# Altium PCB PCB1.PcbDoc (part 2 of 2)
Units mil, origin at the board's own origin, x right, y up, seen from the top; angles counter-clockwise.
Board outline 5905 x 3937 mil, 2 copper layers (Top Layer, Bottom Layer); 159 components, 155 nets, 616 pads, 9 vias.
Unrouted connection lines stored in the file: 401.
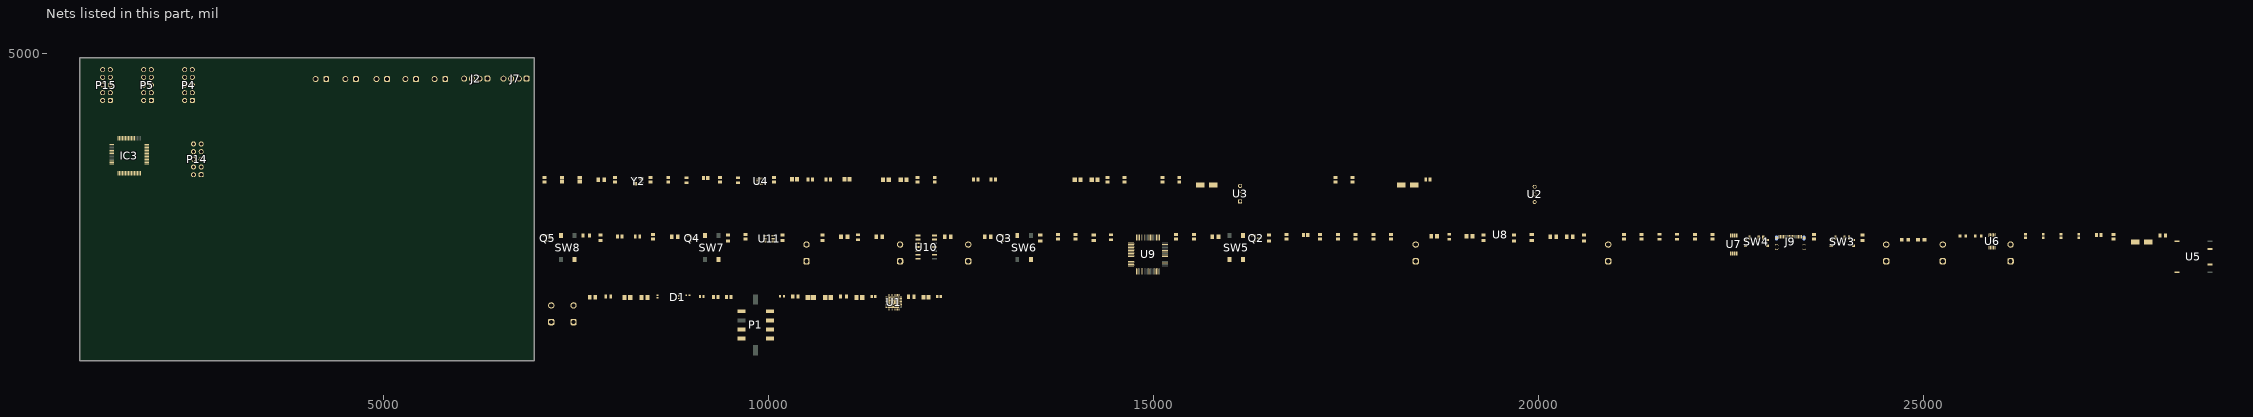
[diagram p2: the nets of this part, all layers, seen from the top]

## Part data
C1 C3: library part CMP-2006-03343-2, "CAP CER 10PF 50V NP0 0603", Capacitance="10 pF", Manufacturer=KEMET, Package=C0603C-CF, Temperature="-55°C to +125°C", Temperature Characteristic=C0G, Temperature Coefficient=30ppm/°C, Temperature Range High=+125°C, Temperature Range Low=-55°C, Tolerance="0.25 pF", Voltage Rating="50 V", Automotive=Yes, Automotive Grade="Grade 1", Category=Cap, ComponentLink2Description=Datasheet, ComponentLink2URL=https://api.kemet.com/component-edge/download/datasheet/C0603C100J5GACAUTO.pdf, Device Class L1="Passive Components", Device Class L2=Capacitors, Device Class L3="Ceramic Capacitors", Digikey Description="CAP CER 10PF 50V NP0 0603", Height=0.87mm, Lead Free=Yes, Manufacturer Part Number=C0603C100C5GACTU, Material=Ceramic, Mouser Description="Multilayer Ceramic Capacitors MLCC - SMD/SMT 50volts 10pF C0G 0.25%", Octopart=https://octopart.com/c0603c100c5gactu-kemet-9138556, RoHS=TRUE
C2: library part CMP-2007-04174-2, "General Purpose Ceramic Capacitor, 0805, 100nF, 10%, X7R, 15%, 100V", Capacitance=100nF, Case Code (Imperial)=0805, Case Code (Metric)=2012, Dielectric=X7R, Dielectric Material=Ceramic, Max Operating Temperature=125°C, Min Operating Temperature=-55°C, Package Quantity=2000, Tolerance=10%, Voltage=100V, Case/Package=0805, Construction=Flat, Contact Plating=Tin, Depth=1.25mm, Height=1.4mm, Lead Free="Lead Free", Length=2.01mm, Mount="Surface Mount", Number of Pins=2, Packaging="Tape and Reel", Radiation Hardening=No, REACH SVHC="No SVHC", RoHS Compliant=Yes, Series=-, Termination=SMD/SMT, Thickness=0.055inch, Voltage Rating=100V, Voltage Rating (DC)=100V, Width=0.049inch
C4: library part CMP-2007-03453-2, "Chip Multilayer Ceramic Capacitors for General Purpose, 0805, 10uF, X5R, 15%, 10%, 16V", Capacitance=10uF, Case Code (Imperial)=0805, Case Code (Metric)=2012, Dielectric=X5R, Max Operating Temperature=85°C, Min Operating Temperature=-55°C, Package Quantity=1, Tolerance=10%, Voltage=16V, Case/Package=0805, Depth=1.25mm, Height=1.25mm, Lead Free="Lead Free", Length=2mm, Material=Ceramic, Mount="Surface Mount", Packaging="Tape and Reel", Radiation Hardening=No, REACH SVHC="No SVHC", Termination=SMD/SMT, Thickness=0.053inch, Voltage Rating=16V, Voltage Rating (DC)=16V, Width=1.25mm
C5 C6: library part CMP-2007-03236-1, Manufacturer=Kemet, Part Number=C0805C105K5RACTU
C7: library part CMP-2007-03243-2, "CAP CER 10UF 10V X5R 0805", 3DS Part Number=220-00001, Capacitance=10uF, Manufacturer=Kemet, Package=C0805C-DG, Temperature="-55°C to +85°C", Temperature Characteristic=X5R, Temperature Coefficient=15%, Temperature Range High=+85°C, Temperature Range Low=-55°C, Tolerance=10%, Voltage=10V, Automotive=No, Category=Cap, ComponentLink2Description=Datasheet, ComponentLink2URL=https://content.kemet.com/datasheets/KEM_C1006_X5R_SMD.pdf, Device Class L1="Passive Components", Device Class L2=Capacitors, Device Class L3="Ceramic Capacitors", Digikey Description="CAP CER 10UF 10V X5R 0805", Height=1.4mm, Ipc Land Pattern Name=CAPC200125X125, Lead Free=Yes, Manufacturer Part Number=C0805C106K8PACTU, Material=Ceramic, Mouser Description="CAP CER 10UF 10V X5R 0805", Octopart=https://octopart.com/c0805c106k8pactu-kemet-98697, RoHS=TRUE, Voltage Rating=10V
C8: library part CMP-03020-032188-1, "CAP CER 0.1UF 10V 5% X7R 0805", Capacitance="0.10 μF", Manufacturer=KEMET, Package=C0805C-DN, Temperature="-55°C to +125°C", Temperature Characteristic=X7R, Temperature Coefficient=30ppm/°C, Temperature Range High=+125°C, Temperature Range Low=-55°C, Tolerance=0.05, Voltage Rating="10 V", Automotive=No, Category=Cap, ComponentLink2Description=Datasheet, ComponentLink2URL=https://content.kemet.com/datasheets/KEM_C1003_C0G_SMD.pdf, Device Class L1="Passive Components", Device Class L2=Capacitors, Device Class L3="Ceramic Capacitors", Digikey Description="CAP CER 0.1UF 10V 5% X7R 0805", Height=0.88mm, Ipc Land Pattern Name=CAPC200125X78, Lead Free=Yes, Manufacturer Part Number=C0805C104J8RACTU, Material=Ceramic, Mouser Description="Multilayer Ceramic Capacitors MLCC - SMD/SMT 10volts 0.1uF X7R 5%", Octopart=https://octopart.com/c0805c104j8ractu-kemet-11807087, RoHS=TRUE
C9: library part CMP-2006-03332-2, "CAP CER 8.2PF 50V NP0 0603", Capacitance="8.2 pF", Manufacturer=KEMET, Package=C0603C-CF, Temperature="-55°C to +125°C", Temperature Characteristic=C0G, Temperature Coefficient=30ppm/°C, Temperature Range High=+125°C, Temperature Range Low=-55°C, Tolerance="0.25 pF", Voltage Rating="50 V", Automotive=Yes, Automotive Grade="Grade 1", Category=Cap, ComponentLink2Description=Datasheet, ComponentLink2URL=https://api.kemet.com/component-edge/download/datasheet/C0603C100J5GACAUTO.pdf, Device Class L1="Passive Components", Device Class L2=Capacitors, Device Class L3="Ceramic Capacitors", Digikey Description="CAP CER 8.2PF 50V NP0 0603", Height=0.87mm, Lead Free=Yes, Manufacturer Part Number=C0603C829C5GACTU, Material=Ceramic, Mouser Description="Multilayer Ceramic Capacitors MLCC - SMD/SMT 50volts 8.2pF C0G 0.25%", Octopart=https://octopart.com/c0603c829c5gactu-kemet-8375751, RoHS=TRUE
C10: library part CMP-03020-011124-1, "CBR0402 2.4 pF 30ppm/°C 0.1 pF C0G 50 V", Capacitance="2.4 pF", Manufacturer=KEMET, Package=CBR04C, Temperature="-55°C to +125°C", Temperature Characteristic=C0G, Temperature Coefficient=30ppm/°C, Temperature Range High=+125°C, Temperature Range Low=-55°C, Tolerance="0.1 pF", Voltage Rating="50 V", Automotive=No, Category=Cap, ComponentLink2Description=Datasheet, ComponentLink2URL=https://content.kemet.com/datasheets/KEM_C1030_CBR_SMD.pdf, Device Class L1="Passive Components", Device Class L2=Capacitors, Device Class L3="Ceramic Capacitors", Height=0.55mm, Ipc Land Pattern Name=CAPC10050X50, Lead Free=Yes, Manufacturer Part Number=CBR04C249B5GAC, Material=Ceramic, Octopart=https://octopart.com/cbr04c249b5gac-kemet-75200062, RoHS=TRUE
C11 C15 C29: library part CMP-05427-002132-1, "CAP ALUM 47UF 20% 16V SMD", Capacitance=47uF, Case/Package=Radial, Dielectric Material=Aluminium, ESR (Equivalent Series Resistance)=700mR, Leakage Current=3uA, Max Operating Temperature=105°C, Min Operating Temperature=-55°C, Package Quantity=1000, Ratings=AEC-Q200, Ripple Current=160mA, Tolerance=20%, Voltage=10V, Voltage Rating=16V, Construction=Cylindrical, Contact Plating=Tin, Diameter=5mm, Height=5.8mm, Height - Seated (Max)=0.228inch, Impedance=700mR, Lead Free="Lead Free", Length=5.8mm, Life (Hours)=2000Hour, Material=Aluminium, Mount="Surface Mount", Number of Pins=2, Packaging="Tape and Reel", Radiation Hardening=No, Reach SVHC Compliant=Yes, Ripple Current (AC)=160mA, RoHS Compliant=Yes, Series=FK, Termination=SMD/SMT, Voltage Rating (DC)=16V, Width=6.5mm
C13 C14 C16 C17 C20 C21 C22 C23 C24 C27 C31 C32 C33 C35 C37 C38 C39 C40 C41 C42 C43 C44 C45 C46 C49 C50 C52 C53 C54 C55: library part CMP-001-00018-6, "Chip Capacitor, 100 nF, +/- 10%, 50 V, 0805 (2012 Metric)", Capacitor Type=Ceramic, Case/Package=0805, Max Operating Temperature=125°C, Min Operating Temperature=-55°C, Tolerance=10%, Voltage Rating=50V, Mounting Technology=SM, Pins=2, RoHS Compliant=True
C18 C19: library part CMP-2000-05810-2, "General Purpose Ceramic Capacitor, 0805, 2.2uF, 10%, X5R, 15%, 10V", Capacitance=2.2uF, Case Code (Imperial)=0805, Case Code (Metric)=2012, Dielectric=X5R, Dielectric Material=Ceramic, Insulation Resistance=500MR, Max Operating Temperature=85°C, Min Operating Temperature=-55°C, Package Quantity=1, Tolerance=10%, Voltage=10V, Case/Package=0805, Construction=Flat, Contact Plating=Tin, Depth=1.25mm, Dissipation Factor=5%, Height=1.4mm, Lead Free="Lead Free", Length=2.01mm, Mount="Surface Mount", Number of Pins=2, Packaging="Tape and Reel", Radiation Hardening=No, REACH SVHC="No SVHC", RoHS Compliant=Yes, Series=-, Size=1.4mm, Termination=SMD/SMT, Thickness=0.055inch, Voltage Rating=10V, Voltage Rating (DC)=10V, Width=0.049inch
C25 C26: library part CMP-2007-04621-1, Manufacturer="AVX Interconnect / Elco", Part Number=08055A150JAT2A
C56 C57: library part CMP-2007-00597-2, "CAP CER 27PF 50V C0G/NP0 0805", Capacitance="27 pF", Manufacturer=KEMET, Package=C0805C-DN, Temperature="-55°C to +125°C", Temperature Characteristic=C0G, Temperature Coefficient=30ppm/°C, Temperature Range High=+125°C, Temperature Range Low=-55°C, Tolerance=0.05, Voltage Rating="50 V", Automotive=No, Category=Cap, ComponentLink2Description=Datasheet, ComponentLink2URL=https://content.kemet.com/datasheets/KEM_C1003_C0G_SMD.pdf, Device Class L1="Passive Components", Device Class L2=Capacitors, Device Class L3="Ceramic Capacitors", Digikey Description="CAP CER 27PF 50V C0G/NP0 0805", Height=0.88mm, Ipc Land Pattern Name=CAPC200125X78, Lead Free=Yes, Manufacturer Part Number=C0805C270J5GACTU, Material=Ceramic, Mouser Description="Cap Ceramic 27pF 50V C0G 5% SMD 0805 125C Plastic T/R", Octopart=https://octopart.com/c0805c270j5gactu-kemet-91046, RoHS=TRUE
D1: library part CMP-2000-07119-2, "LED RGB CLEAR SMD", Case Code (Imperial)=0404, Case Code (Metric)=1010, Color=Blue, Forward Current=2mA, Forward Voltage=2.73V, Lens Color=Colorless, Max Operating Temperature=85°C, Min Operating Temperature=-40°C, Package Quantity=2000, Power Rating=30mW, Case/Package=0404, Height=0.3mm, Lead Free="Lead Free", Length=1mm, Lens Style=Square, Lens Transparency=Clear, Luminous Intensity=20mcd, Mount="Surface Mount", Number of LEDs=3, Packaging="Tape and Reel", REACH SVHC="No SVHC", Test Current=2mA, Viewing Angle=120°, Wavelength=465nm, Width=1mm
D2 D3: library part CMP-1724-00002-2, "LED RED DIFFUSED SMD", Case Code (Imperial)=0805, Case Code (Metric)=2012, Color=Red, Forward Current=20mA, Forward Voltage=2V, Lens Color=White, Max Operating Temperature=80°C, Min Operating Temperature=-25°C, Package Quantity=1, Approvals=UL, Case/Package=0805, Dominant Wavelength=635nm, Height=0.8mm, Illumination Color=Red, Lead Free="Lead Free", Length=2mm, Lens Style=Rectangular, Lens Transparency=Diffused, Luminous Intensity=11mcd, Mount="Surface Mount", Number of LEDs=1, Number of Pins=2, Packaging="Tape and Reel", REACH SVHC="No SVHC", Test Current=20mA, Viewing Angle=140°, Wavelength=635nm, Width=1.25mm
DS1 DS2: library part CMP-1724-00001-1, "LED, GREEN, 565 nm, 2 V, -25 to 80 degC, 2-Pin SMD, RoHS, Tape and Reel", Case Code (Imperial)=0805, Case Code (Metric)=2012, Max Operating Temperature="85 degC", Min Operating Temperature="-25 degC", Package Quantity=4000, Case\/Package=0805, ComponentLink1Description="Manufacturer URL", ComponentLink1URL=http://www.lumexinstruments.com/, ComponentLink2Description=Datasheet, ComponentLink2URL=http://www.lumex.com/content/files/ProductAttachment/SML-LXT0805GW-TR.pdf, DatasheetVersion="Rev. F, 09/2009", Length="2 mm", Mount="Surface Mount", Mounting Technology="Surface Mount", PackageDescription="2-Pin Surface Mount Device, Body 2 x 1.25 mm", PackageReference=SML-LXT0805, Packaging="Tape and Reel", REACH SVHC="No SVHC", RoHSCompliant=true, Width="1.25 mm"
FB1 FB2: library part CMP-2000-05194-2, "FERRITE BEAD 600 OHM 0805 1LN", Case Code (Imperial)=0805, Case Code (Metric)=2012, Current Rating=500mA, DC Resistance (DCR)=300mR, Frequency=100MHz, Max Operating Temperature=125°C, Min Operating Temperature=-40°C, Package Quantity=1, Case/Package=0805, Contact Plating=Tin, Core Material=Ferrite, Depth=1.45mm, Height=1.25mm, Impedance=600R, Lead Free="Lead Free", Length=2mm, Material=Ferrite, Max Current Rating=500mA, Max DC Current=500mA, Mount="Surface Mount", Number of Lines=1, Packaging="Tape and Reel", Termination=SMD/SMT, Test Frequency=100MHz, Weight=0.00392oz, Width=0.049inch
IC3: "Integrated Circuit", Manufacturer_Name=STMicroelectronics, Mouser Part Number=511-STM32H7A3RIT6, Arrow Part Number=STM32H7A3RIT6, Arrow Price/Stock=https://www.arrow.com/en/products/stm32h7a3rit6/stmicroelectronics, Datasheet Link=https://www.st.com/resource/en/datasheet/stm32h7a3ai.pdf, Height=1.6mm, Manufacturer_Part_Number=STM32H7A3RIT6, Mouser Price/Stock=https://www.mouser.co.uk/ProductDetail/STMicroelectronics/STM32H7A3RIT6?qs=xZ%2FP%252Ba9zWqZAEQXxnLVEdg%3D%3D
J2 J7: library part CMP-1502-02458-2, NexarPartId=105950651
J3 J4 J5 J6 J8: library part CMP-1502-02464-2, Color="Blue, Green", Current=10A, Max Operating Temperature=105°C, Min Operating Temperature=-40°C, Voltage=300V, Contact Material=Brass, Contact Plating="Brass, Tin", Current Rating=10A, Height=8.7mm, Housing Material=Nylon, Lead Pitch=3.5mm, Length=7.4mm, Mount="Through Hole", NexarPartId=18818288, Number of Contacts=2, Number of Levels=1, Number of Pins=2, Number of Positions Per Level=2, Number of Rows=1, Packaging=Box, Pitch=3.5052mm, Plating="Brass, Steel", REACH SVHC=Unknown, RoHS=Compliant, Stripping Length=-6mm, Termination=Screw, Voltage Rating=300V, Width=7.9mm, Wire Gauge (Max)=24AWG, Wire Gauge (Min)=16AWG, Wire/Cable Gauge=24AWG
J9: library part CMP-04767-000030-2, "CONN RCP USB2.0 TYP C 24P SMD RA", Current Rating=5A, Max Operating Temperature=85°C, Min Operating Temperature=-40°C, Voltage Rating=30V, Contact Material="Gold, Nickel", Country of Origin=CN, Gender=Receptacle, NexarPartId=114105384, Number of Contacts=16, Schedule B="8536695050, 8536695050", USB Standard="USB 2.0"
L1: library part CMP-06042-008021-1, "Wire Wound RF Inductor 4.3nH ±0.2nH 850mA 0.059Ω 0603 (1608)", Case Code (Imperial)=0603, Case Code (Metric)=1608, Current=750mA, Current Rating=850mA, DC Resistance (DCR)=59mR, Inductance=4.3nH, Max Operating Temperature=125°C, Min Operating Temperature=-55°C, Package Quantity=4000, Resistor Type=Wirewound, Self Resonant Frequency=6GHz, Test Frequency=100MHz, Case/Package=0603, Core Material=Non-Magnetic, DC Current=850mA, Depth=1mm, Height=0.8mm, Height - Seated (Max)=0.039inch, Length=1.6mm, Max DC Current=850mA, Military Standard=Not, Mount="Surface Mount", Packaging="Tape and Reel", Q Factor=35, Radiation Hardening=No, REACH SVHC="No SVHC", Series Resistance=59mR, Shielding=Unshielded, Termination=SMD/SMT, Weight=0.000106oz, Width=0.031inch
L2: library part CMP-03913-120013755-1, "7447840015G Multilayer Inductor, 1.5Nh, 0.3A, 0402 Rohs Compliant: Yes", Ambient Temperature Range High=105°C, Ambient Temperature Range Low=-55°C, Current Rating=300mA, Inductance=1.5nH, Max Operating Temperature=125°C, Height=500µm, Length=1mm, Min Operating Temperature=-55°C, NexarPartId=120013755, RoHS=Compliant, Width=500µm
P1: library part CMP-1502-00343-2, Color=Black, Contact Resistance=10mΩ, Current Rating=5A, Insulation Resistance=1GΩ, Max Operating Temperature=105°C, Min Operating Temperature=-40°C, Operating Supply Voltage=250V, Connector Type="Male Pin, Socket", Contact Material=Copper, Contact Plating=Tin, Fastening Type=Ramp, Gender=Male, Height=9.9mm, Housing Material=Nylon, Lead Pitch=3mm, Length=15.7mm, Mount="Surface Mount", NexarPartId=8917603, Number of Contacts=8, Number of Pins=8, Number of Positions=8, Number of Rows=2, Orientation=Vertical, Pitch=3mm, REACH SVHC=Unknown, RoHS=Compliant, Row Spacing=2.9972mm, Termination=Solder, Width=15.7mm
P2 P3 P6 P7 P8 P9 P10 P11 P12 P13: library part CMP-1502-00493-2, Color=White, Contact Resistance=10mΩ, Current Rating=9A, Flammability Rating="UL94 V-0", Insulation Resistance=1GΩ, Max Operating Temperature=105°C, Min Operating Temperature=-40°C, Operating Supply Voltage=600V, Connector Type="Male Pin, Socket", Contact Gender=Male, Contact Material=Copper, Contact Plating=Tin, Fastening Type=Ramp, Gender=Male, Height=12.8mm, Housing Material=Nylon, Lead Length=3.5mm, Lead Pitch=4.2mm, Length=5.4mm, Mount="Through Hole", NexarPartId=8917578, Number of Contacts=2, Number of Pins=2, Number of Positions=2, Number of Rows=2, Orientation=Vertical, Pitch=4.2mm, REACH SVHC=Unknown, RoHS=Compliant, Row Spacing=5.5118mm, Termination=Solder, Voltage Rating=600V, Width=5.5mm
P4 P5 P14 P15: library part CMP-1502-01084-3, Color=Black, Contact Resistance=20mΩ, Current Rating=3A, Flammability Rating="UL94 V-0", Insulation Resistance=1GΩ, Max Operating Temperature=105°C, Min Operating Temperature=-40°C, Operating Supply Voltage=250V, Connector Type="Male Pin", Contact Gender=Male, Contact Material=Copper, Contact Mating Length=5.9944mm, Contact Plating=Gold, Gender=Male, Height=2.54mm, Housing Material=PBT, Insulation=Insulated, Lead Pitch=2.54mm, Length=12.7mm, Mount="Through Hole", NexarPartId=18818163, Number of Contacts=10, Number of Pins=10, Number of Positions=10, Number of Rows=2, Orientation=Vertical, Packaging=Bulk, Pitch=2.54mm, REACH SVHC=Unknown, RoHS=Compliant, Row Spacing=2.54mm, Termination="Through Hole", Voltage Rating=250V, Width=12.7mm
Q2 Q3 Q4 Q5: library part CMP-07173-000101-1, "MOSFET N-CH 50V 220MA SOT-23", Case/Package=SOT-23, Continuous Drain Current (ID)=220mA, Drain to Source Breakdown Voltage=50V, Drain to Source Resistance=3.5R, Gate to Source Voltage (Vgs)=20V, Input Capacitance=27pF, Max Operating Temperature=150°C, Max Power Dissipation=360mW, Min Operating Temperature=-55°C, On-State Resistance=6R, Package Quantity=1, Threshold Voltage=1.3V, Contact Plating=Tin, Current Rating=220mA, Drain to Source Voltage (Vdss)=50V, Dual Supply Voltage=50V, Element Configuration=Single, Fall Time=9ns, Height=0.93mm, Lead Free="Lead Free", Length=2.92mm, Mount="Surface Mount", Nominal Vgs=1.3V, Number of Elements=1, Number of Pins=3, Packaging="Tape and Reel", Power Dissipation=360mW, Radiation Hardening=No, Rds On Max=3.5R, REACH SVHC="No SVHC", Rise Time=9ns, Termination=SMD/SMT, Turn-Off Delay Time=20ns, Turn-On Delay Time=2.5ns, Voltage Rating (DC)=50V, Weight=0.03g, Width=1.3mm
R1: library part CMP-2001-04775-1, Manufacturer="Vishay Dale", Part Number=TNPW0805499RBEEN
R2: library part CMP-2001-03663-1, Manufacturer="Vishay Dale", Part Number=CRCW0805200RFKEA
R5: library part CMP-2001-00513-1, Manufacturer=Panasonic, Part Number=ERJ6ENF1202V
R8: library part CMP-03211-006924-1, "SMD Chip Resistor, Thin Film, 12KΩ, 100 V, 0805 [2012 Metric], 100 mW, 0.1%, RN73 Series", Manufacturer="TE Connectivity", Package=RN732A, Power Rating=0.1W, Resistance=12KΩ, Temperature="-55°C to 155°C", Temperature Coefficient=10ppm/°C, Temperature Range High=155°C, Temperature Range Low=-55°C, Tolerance=0.1%, Voltage Rating=100V, Automotive=No, Category=Res, ComponentLink2Description=Datasheet, ComponentLink2URL=https://www.te.com/commerce/DocumentDelivery/DDEController?Action=showdoc&DocId=Data+Sheet%7F1773270%7FP%7Fpdf%7FEnglish%7FENG_DS_1773270_P.pdf%7F1676162-2, Composition="Thin Film", Device Class L1="Passive Components", Device Class L2=Resistors, Device Class L3="Chip SMD Resistors", Height=0.65mm, Ipc Land Pattern Name=RESC200125X55, Lead Free=Yes, Manufacturer Part Number=RN73C2A12KBTG, Octopart=https://octopart.com/rn73c2a12kbtg-te+connectivity-22737727, octopart_url=https://octopart.com/rn73c2a12kbtg-te+connectivity-22737727, Packaging="250 cut tape length", RoHS=TRUE, Series=RN73
R9: library part CMP-2001-00580-1, Manufacturer=Panasonic, Part Number=ERA6AEB101V
R10: library part CMP-2001-00076-1, Manufacturer=Panasonic, Part Number=ERJ-6ENF24R9V
R12: library part CMP-2001-03692-2, "RES Thick Film, 22Ω, 1%, 0.125W, 100ppm/°C, 0805", Case Code (Imperial)=0805, Case Code (Metric)=2012, Max Operating Temperature=155°C, Max Power Dissipation=125mW, Min Operating Temperature=-55°C, Package Quantity=5000, Resistance=22R, Temperature Coefficient=100ppm/°C, Tolerance=1%, Voltage Rating=150V, Case/Package=0805, Composition="Thick Film", Contact Plating=Tin, Depth=1.25mm, Features="Automotive AEC-Q200", Height=0.45mm, Lead Free="Lead Free", Length=2mm, Military Standard=Not, Mount="Surface Mount", Number of Terminations=2, Packaging="Tape and Reel", Power Rating=125mW, Radiation Hardening=No, Termination=SMD/SMT, Voltage Rating (DC)=150V, Weight=0.000194oz, Width=1.25mm
R13: library part CMP-2001-00211-2, "RES SMD 499 OHM 1% 1/8W 0805", Case Code (Imperial)=0805, Case Code (Metric)=2012, Max Operating Temperature=155°C, Max Power Dissipation=125mW, Min Operating Temperature=-55°C, Package Quantity=1, Resistance=499R, Resistance Tolerance=1%, Resistor Type="Thick Film", Temperature Coefficient=100ppm/°C, Voltage Rating=150V, Case/Package=0805, Construction=Rectangular, Contact Plating=Tin, Depth=1.25mm, Features="Automotive AEC-Q200", Height=0.6mm, Lead Free="Lead Free", Length=2mm, Military Standard=Not, Mount="Surface Mount", Number of Terminations=2, Packaging="Tape and Reel", Power Rating=125mW, Radiation Hardening=No, REACH SVHC="No SVHC", RoHS Compliant=Yes, Series=ERJ, Technology="THICK FILM", Termination=SMD/SMT, Tolerance=1%, Voltage Rating (DC)=150V, Width=0.049inch, Working Voltage=150V
R16 R17 R22 R23 R30: library part CMP-2001-00582-2, "Metal Film Chip Resistor, High Reliability Type, 0.125 W, +/- 0.1%, -55 to 155 degC, 0805 (2012 Metric), RoHS, Tape and Reel", Case Code - in=0805, Case Code - mm=2012, Manufacturer=Panasonic, Operating Temperature Range=-55Cto+155C, Package / Case=0805(2012metric), Package Description="2-Pin Surface Mount Device, Body 2 x 1.25 mm", Power Rating=125mW(1/8W), Resistance=10kOhms, Temperature Coefficient=25PPM/C, Tolerance=0.1%, Voltage Rating=100V, Brand=Panasonic, Datasheet URL=https://industrial.panasonic.com/cdbs/www-data/pdf/RDM0000/AOA0000C307.pdf, Datasheet Version=02/2016, Factory Pack Quantity=5000, Height=0.5mm, Length=2mm, Manufacturer URL=http://www.panasonic.com/, Mounting Technology=SurfaceMount, Package Reference=0805, Packaging=Reel, Product=ThinFilmResistorsSMD, Product Category=ThinFilmResistors-SMD, RoHS=Details, Series=ERA-6A, Termination Style=SMD/SMT, Type=MetalFilmChipResistors, Width=1.25mm
R18 R19 R24 R25: library part CMP-2001-00644-1, Manufacturer=Panasonic, Part Number=ERA6AEB472V
R20 R21 R26 R27: library part CMP-2001-00581-2, "RES 1K OHM 0.1% 1/8W 0805", Case Code (Imperial)=0805, Case Code (Metric)=2012, Max Operating Temperature=155°C, Max Power Dissipation=125mW, Min Operating Temperature=-55°C, Package Quantity=5000, Resistance=1kR, Resistance Tolerance=0.1%, Resistor Type="Thin Film", Temperature Coefficient=25ppm/°C, Voltage Rating=100V, Case/Package=0805, Construction=Rectangular, Contact Plating=Tin, Depth=1.25mm, Height=0.5mm, Length=2mm, Military Standard=Not, Mount="Surface Mount", Number of Pins=2, Number of Terminations=2, Packaging="Tape and Reel", Power Rating=125mW, Radiation Hardening=No, REACH SVHC="No SVHC", RoHS Compliant=Yes, Series=ERA-6A, Technology="THIN FILM", Termination=SMD/SMT, Tolerance=0.1%, Width=1.25mm, Working Voltage=100V
R28 R29 R48 R54: library part CMP-1013-00378-3, "RES Thick Film, 68Ω, 1%, 0.125W, 100ppm/°C, 0805", Case Code (Imperial)=0805, Case Code (Metric)=2012, Max Operating Temperature=155°C, Max Power Dissipation=125mW, Min Operating Temperature=-55°C, Package Quantity=5000, Resistance=68R, Temperature Coefficient=100ppm/°C, Tolerance=1%, Voltage Rating=150V, Case/Package=0805, Composition="Thick Film", Contact Plating=Tin, Depth=1.25mm, Features="Automotive AEC-Q200", Height=0.45mm, Lead Free="Lead Free", Length=2mm, Military Standard=Not, Mount="Surface Mount", Number of Terminations=2, Packaging="Tape and Reel", Power Rating=125mW, Radiation Hardening=No, Termination=SMD/SMT, Voltage Rating (DC)=150V, Weight=0.000194oz, Width=0.049inch
R31 R36 R44 R49 R56 R57 R60: library part CMP-1659-00013-4, "Chip Resistor, 10 KOhm, +/- 1%, 0.125 W, -55 to 155 degC, 0805 (2012 Metric), RoHS, Tape and Reel", Manufacturer=Yageo, Max Operating Temperature="155 degC", Min Operating Temperature="-55 degC", Package Quantity=5000, Voltage Rating="150 V", ComponentLink1Description="Manufacturer URL", ComponentLink1URL=http://www.yageo.com/, ComponentLink2Description=Datasheet, ComponentLink2URL=http://www.yageo.com/documents/recent/PYu-RC_Group_51_RoHS_L_04.pdf, DatasheetVersion="Rev. 4, 02/2016", Height="0.5 mm", Length="2 mm", Mount="Surface Mount", Mounting Technology="Surface Mount", PackageDescription="2-Pin Surface Mounted Device, Body 2 x 1.25 mm", PackageReference=0805, Packaging="Tape and Reel", Pins=2, REACH SVHC="No SVHC", RoHSCompliant=true
R32 R33 R34 R35: library part CMP-2000-00110-1, Manufacturer=Panasonic, Part Number=ERA3AEB680V
R37: library part CMP-2001-03961-1, Manufacturer="Vishay Dale", Part Number=CRCW08054K30FKEA
R38 R45: library part CMP-2000-06961-1, "Chip Resistor, 470 Ohm, +/- 1%, 125 mW, -55 to 155 degC, 0805 (2012 Metric), RoHS, Tape and Reel", Manufacturer=Yageo, Package Description="2-Pin Surface Mounted Device, Body 2 x 1.25 mm", Package Reference=0805, Power Rating=250mW, Resistance=470ohm, Resistance Tolerance=±1%, Resistor Case Style=0805[2012Metric], Resistor Element Type=ThickFilm, Temperature Coefficient=±100ppm/°C, Voltage Rating=150V, Automotive Qualification Standard=-, Datasheet URL=http://www.yageo.com/documents/recent/PYu-RC_Group_51_RoHS_L_7.pdf, Datasheet Version="Rev. 7, 05/2017", Manufacturer URL=http://www.yageo.com/, Mounting Technology=SurfaceMount, MSL=MSL1-Unlimited, Packaging=Tape&Reel, Product Range=-, SVHC=ToBeAdvised
R39 R43: library part CMP-03211-010210-1, "SMD Chip Resistor, Thin Film, 5.11KΩ, 100 V, 0805 [2012 Metric], 100 mW, 0.1%, RN73 Series", Manufacturer="TE Connectivity", Package=RN732A, Power Rating=0.1W, Resistance=5.11KΩ, Temperature="-55°C to 155°C", Temperature Coefficient=10ppm/°C, Temperature Range High=155°C, Temperature Range Low=-55°C, Tolerance=0.1%, Voltage Rating=100V, Automotive=No, Category=Res, ComponentLink2Description=Datasheet, ComponentLink2URL=https://www.te.com/commerce/DocumentDelivery/DDEController?Action=showdoc&DocId=Data+Sheet%7F1773270%7FP%7Fpdf%7FEnglish%7FENG_DS_1773270_P.pdf%7F1676162-2, Composition="Thin Film", Device Class L1="Passive Components", Device Class L2=Resistors, Device Class L3="Chip SMD Resistors", Height=0.65mm, Ipc Land Pattern Name=RESC200125X55, Lead Free=Yes, Manufacturer Part Number=RN73C2A5K11BTDF, Octopart=https://octopart.com/rn73c2a5k11btdf-te+connectivity-41219646, octopart_url=https://octopart.com/rn73c2a5k11btdf-te+connectivity-41219646, Packaging="1000 Reel", RoHS=TRUE, Series=RN73
R40 R41 R47: library part CMP-2100-03673-1, "Chip Resistor, 0 Ohm, Jumper, +/- 5%, 0.125 W, -55 to 155 degC, 0805 (2012 Metric), RoHS, Tape and Reel", Case Code (Imperial)=0805, Case Code (Metric)=2012, Manufacturer=Yageo, Max Operating Temperature=155degC, Min Operating Temperature=-55degC, Package Description="2-Pin Surface Mounted Device, Body 2 x 1.25 mm", Power Rating=125mW, Resistance=0mOhm, Temperature Coefficient=200ppm/degreesC, Tolerance=5%, Voltage Rating=150V, Case/Package=0805, Composition=ThickFilm, Contact Plating=Tin, Datasheet URL=http://www.yageo.com/NewPortal/yageodocoutput?fileName=/pdf/R-Chip/PYu-RC_Group_51_RoHS_L_5.pdf, Datasheet Version="Rev. 5, 10/2016", Depth=1.25mm, Height=0.5mm, Lead Free=LeadFree, Length=2mm, Manufacturer URL=http://www.yageo.com/, Military Standard=Not, Number of Pins=2, Package Reference=0805, Packaging=TapeandReel, Radiation Hardening=No, REACH SVHC=Unknown, RoHSCompliant=true, Termination=SMD/SMT, Voltage Rating (DC)=150V, Width=1.25mm
R42: library part CMP-2001-03615-2, "RES Thick Film, 1.5kΩ, 1%, 0.125W, 100ppm/°C, 0805", Case Code (Imperial)=0805, Case Code (Metric)=2012, Max Operating Temperature=155°C, Max Power Dissipation=125mW, Min Operating Temperature=-55°C, Package Quantity=10, Resistance=1.5kR, Temperature Coefficient=100ppm/°C, Tolerance=1%, Voltage Rating=150V, Case/Package=0805, Composition="Thick Film", Contact Plating=Tin, Depth=1.25mm, Features="Automotive AEC-Q200", Height=0.45mm, Lead Free="Lead Free", Length=2mm, Military Standard=Not, Number of Terminations=2, Packaging="Tape and Reel", Power Rating=125mW, Radiation Hardening=No, Termination=SMD/SMT, Voltage Rating (DC)=150V, Weight=0.000194oz, Width=0.049inch
R46 R50 R58 R61: library part CMP-03211-000756-1, "SMD Chip Resistor, Thin Film, 100Ω, 100 V, 0805 [2012 Metric], 100 mW, 0.1%, RN73 Series", Manufacturer="TE Connectivity", Package=RN732A, Power Rating=0.1W, Resistance=100Ω, Temperature="-55°C to 155°C", Temperature Coefficient=10ppm/°C, Temperature Range High=155°C, Temperature Range Low=-55°C, Tolerance=0.1%, Voltage Rating=100V, Automotive=No, Category=Res, ComponentLink2Description=Datasheet, ComponentLink2URL=https://www.te.com/commerce/DocumentDelivery/DDEController?Action=showdoc&DocId=Data+Sheet%7F1773270%7FP%7Fpdf%7FEnglish%7FENG_DS_1773270_P.pdf%7F1676162-2, Composition="Thin Film", Device Class L1="Passive Components", Device Class L2=Resistors, Device Class L3="Chip SMD Resistors", Height=0.65mm, Ipc Land Pattern Name=RESC200125X55, Lead Free=Yes, Manufacturer Part Number=RN73C2A100RBTDF, Octopart=https://octopart.com/rn73c2a100rbtdf-te+connectivity-41188433, octopart_url=https://octopart.com/rn73c2a100rbtdf-te+connectivity-41188433, Packaging="1000 Reel", RoHS=TRUE, Series=RN73
R51 R52: library part CMP-2100-03670-1, "Chip Resistor, 10 Ohm, +/- 1%, 0.125 W, -55 to 155 degC, 0805 (2012 Metric), RoHS, Tape and Reel", Case Code (Imperial)=0805, Case Code (Metric)=2012, Manufacturer=Yageo, Max Operating Temperature=155degC, Max Power Dissipation=125mW, Min Operating Temperature=-55degC, Package Description="2-Pin Surface Mounted Device, Body 2 x 1.25 mm", Package Quantity=1, Resistance=10Ohm, Temperature Coefficient=200ppm/degreesC, Tolerance=1%, Voltage Rating=150V, Case/Package=0805, Composition=ThickFilm, Datasheet URL=http://www.yageo.com/NewPortal/yageodocoutput?fileName=/pdf/R-Chip/PYu-RC_Group_51_RoHS_L_5.pdf, Datasheet Version="Rev. 5, 10/2016", Depth=1.25mm, Height=0.5mm, Lead Free=LeadFree, Length=2mm, Manufacturer URL=http://www.yageo.com/, Number of Pins=2, Number of Terminations=2, Package Reference=0805, Packaging=TapeandReel, Power Rating=125mW, REACH SVHC=NoSVHC, RoHSCompliant=true, Termination=SMD/SMT, Voltage Rating (DC)=150V, Width=1.25mm
R53: library part CMP-2100-03671-1, "Chip Resistor, 1 KOhm, +/- 1%, 125 mW, -55 to 155 degC, 0805 (2012 Metric), RoHS, Tape and Reel", Case Code (Imperial)=0805, Case Code (Metric)=2012, Manufacturer=Yageo, Max Operating Temperature=155degC, Max Power Dissipation=125mW, Min Operating Temperature=-55degC, Package Description="2-Pin Surface Mounted Device, Body 2 x 1.25 mm", Package Quantity=1, Resistance=1KOhm, Temperature Coefficient=100ppm/degreesC, Tolerance=1%, Voltage Rating=150V, Case/Package=0805, Composition=ThickFilm, Datasheet URL=http://www.yageo.com/NewPortal/yageodocoutput?fileName=/pdf/R-Chip/PYu-RC_Group_51_RoHS_L_5.pdf, Datasheet Version="Rev. 5, 10/2016", Depth=1.25mm, Height=0.024inch, Lead Free=LeadFree, Length=0.079inch, Manufacturer URL=http://www.yageo.com/, Military Standard=Not, Number of Pins=2, Number of Terminations=2, Package Reference=0805, Packaging=TapeandReel, Power Rating=125mW, REACH SVHC=Unknown, RoHSCompliant=true, Termination=SMD/SMT, Voltage Rating (DC)=150V, Width=0.049inch
R55: library part CMP-2001-04934-2, "RES Thick Film, 12kΩ, 1%, 0.125W, 100ppm/°C, 0805", Case Code (Imperial)=0805, Case Code (Metric)=2012, Max Operating Temperature=155°C, Max Power Dissipation=125mW, Min Operating Temperature=-55°C, Package Quantity=10, Resistance=12kR, Temperature Coefficient=100ppm/°C, Tolerance=1%, Voltage Rating=150V, Case/Package=0805, Composition="Thick Film", Contact Plating=Tin, Depth=1.25mm, Features="Automotive AEC-Q200", Height=0.45mm, Lead Free="Lead Free", Length=2mm, Military Standard=Not, Mount="Surface Mount", Number of Terminations=2, Packaging="Tape and Reel", Power Rating=125mW, Radiation Hardening=No, Termination=SMD/SMT, Voltage Rating (DC)=150V, Weight=0.000194oz, Width=0.049inch
R59: library part CMP-2001-01361-1, Manufacturer=Yageo, Part Number=RC0805JR-072KL
R62: library part CMP-009-00007-5, "Chip Resistor, 0 Ohm, 0.125 W, -55 to 155 degC, 0805 (2012 Metric)", Case/Package=0805, Max Operating Temperature=155°C, Min Operating Temperature=-55°C, Power=125mW, Tolerance=5%, Voltage Rating=50V, Mounting Technology=SM, Pins=2, RoHS Compliant=True
SW3 SW4: library part CMP-2000-06884-2, "SWITCH SLIDE SPDT 300MA 6V", Contact Current Rating=300mA, Contact Resistance=70mR, Insulation Resistance=100mR, Max Operating Temperature=85°C, Max Voltage Rating (DC)=6V, Min Operating Temperature=-20°C, Package Quantity=1, Actuator Length=1.5mm, Actuator Material=Nylon, Actuator Type=Standard, Contact Material="Copper Alloy", Contact Plating=Silver, Current Rating=300mA, Depth=5mm, Lead Free="Lead Free", Length=7.7mm, Max Current Rating=300mA, Mechanical Life=10000Cycles, Mount="Surface Mount", Orientation="Right Angle", Packaging="Tape and Reel", REACH SVHC="No SVHC", Switch Function=On-On, Switch Travel=1.5mm, Termination="Gull Wing", Throw Configuration=SPDT, Voltage Rating (AC)=6V, Voltage Rating (DC)=6V, Width=6.7mm
SW5 SW6 SW7 SW8: library part CMP-2000-05160-2, "SWITCH TACTILE SPST-NO 0.05A 12V", Case/Package=SMD/SMT, Color=Black, Contact Resistance=100mR, Current Rating=50mA, Max Operating Temperature=60°C, Max Voltage Rating (DC)=12V, Min Operating Temperature=-20°C, Operating Force=160gf, Package Quantity=1, Actuator Length=0.85mm, Actuator Material=Nylon, Actuator Type=Standard, Contact Material=Silver, Contact Plating=Silver, Depth=9mm, Illumination Type=Non-Illuminated, Lead Free="Lead Free", Length=6mm, Max Current Rating=50mA, Mechanical Life=100000Cycles, Mount="Surface Mount", Orientation=Straight, Packaging="Tape and Reel", REACH SVHC="No SVHC", Switch Function=Off-Mom, Termination="Gull Wing", Throw Configuration=SPST, Voltage Rating (DC)=12V
U1: library part CMP-2000-07453-1, "Low-Power, Highly-Integrated Wi-Fi Solution, 2.5 to 3.6 V, 80 mA, -40 to 125 degC, 32-Pin QFN", Manufacturer="Espressif Systems", Package Description="32-Pin Quad Falt No-Lead, Body 5 x 5 mm, Pitch 0.5 mm", Package Reference=QFN-32, Datasheet URL=http://espressif.com/sites/default/files/documentation/0a-esp8266ex_datasheet_en.pdf, Datasheet Version="Rev. 5.4, 04/2017", Manufacturer URL=http://espressif.com, Mounting Technology=SurfaceMount
U2: library part CMP-2000-05426-2, Case/Package=SIP, Max Input Voltage=36V, Max Input Voltage (DC)=32V, Max Operating Temperature=85°C, Max Output Current=1A, Max Output Power=3.3W, Min Input Voltage=4.75V, Min Input Voltage (DC)=5.5V, Min Operating Temperature=-40°C, Nominal Output Voltage=3.3V, Nominal Supply Current=1mA, Switching Frequency=500kHz, Depth=7.6mm, Efficiency=79%, Height=10.2mm, Isolation=Isolated, Length=11.7mm, Max Supply Voltage=36V, Min Supply Voltage=4.75V, Mount="Through Hole", NexarPartId=9539342, Number of Outputs=1, Number of Pins=3, Output Current=1A, Output Power=3.3W, Output Type=Fixed, Output Voltage=3.3V, Power Rating=3.3W, Radiation Hardening=No, REACH SVHC="No SVHC", RoHS=Compliant, Weight=1.9g, Width=7.6mm
U3: library part CMP-2000-05427-1, "DC/DC converter, 5 VDC, 1000 mA, -40 to 85 degC, 3-Pin SIP, RoHS", Input Voltage DC Max=36V, Input Voltage DC Min=6.5V, Manufacturer=Tracopower, Output Current Max=1A, Output Power Max=5W, Output Voltage Nom.=5V, Package Description="3-Pin Single In-line Package, Body 11.7 x 7.6 mm, Pitch 2.54 mm", Package Reference=SIP-3, Approvals & Standards=IEC,UL, Datasheet URL=https://datasheet.ciiva.com/6815/tsr1-6815641.pdf, Datasheet Version=Jan-15, DC / DC Converter Mounting=ThroughHole, DC / DC Converter Output Type=Fixed, DC / DC Converter Type=SIP, Depth=11.7mm, Height=10.2mm, Manufacturer URL=http://www.tracopower.com/home, No. of Outputs=1Output, Product Range=TSR-1Series, Width=7.6mm
U4: library part CMP-12177-000010-1, "INEMO INERTIAL MODULE: 3D ACCELE", Manufacturer=STMicroelectronics, Max Supply Voltage=3.6V, Min Supply Voltage=1.62V, Operating Supply Current=0.55mA, Package=LGA-14L-DM00249496, Temperature="-40°C to +85°C", Temperature Range High=+85°C, Temperature Range Low=-40°C, Accel Range=2/4/8/16g, Accel Sensitivity=0.061/0.122/0.244/0.488mV/g, Automotive=No, Category=IC, ComponentLink2Description=Datasheet, ComponentLink2URL=https://www.st.com/resource/en/datasheet/lsm6dsox.pdf, Device Class L1=Sensors, Device Class L2="Motion Sensors", Device Class L3="Inertial Measurement Units (IMUs)", Digikey Description="INEMO INERTIAL MODULE: 3D ACCELE", Footprint Url=https://www.st.com/content/ccc/resource/technical/document/technical_note/73/17/9c/16/dd/96/4a/01/CD00134799.pdf/files/CD00134799.pdf/jcr:content/translations/en.CD00134799.pdf, Gyro Range=125/250/500/1000/2000°/s, Gyro Sensitivity=4.375/8.75/17.5/35/70LSB/°/s, Height=0.86mm, Lead Free=Yes, Manufacturer Part Number=LSM6DSOXTR, Mouser Description="LSM6DSOX: 3.6 V 3 Axis Accelerometer Gyroscope iNEMO Inertial Module - LGA-14L", Octopart=https://octopart.com/lsm6dsoxtr-stmicroelectronics-98102600, RoHS=TRUE, Sensor Output=I2C,SPI,Other, Sensor Type=Temperature,Accelerometer,Gyroscope
U5: library part CMP-01539-55433846-1, "TSRN 1-2433SM Non Isolated Board Mount Dc/dc Converter, Surface Mount Dip, 5.5 W, 1.5 V, 5.5 V, 1 A, 4.6 V Rohs Compliant: Yes", Case/Package=SMD/SMT, Max Input Voltage=42V, Max Operating Temperature=85°C, Max Output Current=1A, Max Output Power=5.5W, Max Output Voltage=5.5V, Min Input Voltage=4.6V, Min Operating Temperature=-40°C, Min Output Voltage=1.5V, Output Voltage=3.3V, Depth=15.2mm, Efficiency=80%, Height=7mm, Isolation=Non-Isolated, Length=15.2mm, Max Input Voltage (DC)=42V, Min Input Voltage (DC)=4.6V, Mount="Surface Mount", NexarPartId=55433846, Number of Outputs=1, Number of Pins=6, Output Current=1A, Output Power=5.5W, REACH SVHC="No SVHC", RoHS=Compliant, Weight=1.7kg, Width=9.3mm
U6: library part CMP-04892-000058-1, "IC SWITCH DUAL SPDT 10MSOP", Case/Package=VSSOP, High Level Output Current=50mA, Max Operating Temperature=85°C, Max Supply Current=1uA, Max Supply Voltage=5.5V, Min Operating Temperature=-40°C, Min Supply Voltage=1.8V, On-State Resistance=10R, Package Quantity=1, Bandwidth=220MHz, Contact Plating=Gold, Height=1.02mm, Lead Free="Lead Free", Length=3mm, Low Level Output Current=50mA, Mount="Surface Mount", Number of Bits=2, Number of Channels=2, Number of Inputs=2, Number of Outputs=4, Number of Pins=10, Operating Supply Current=1uA, Packaging="Tape and Reel", Polarity=Non-Inverting, Radiation Hardening=No, Series=-, Supply Type=Single, Throw Configuration=SPDT, Turn-Off Delay Time=3.8ns, Turn-On Delay Time=5.7ns, Weight=0.000663oz, Width=3mm
U7: library part CMP-0339-00043-2, "Dual In / Single Out Autoswitching Power Mux, 2.8 to 5.5 V, -40 to 85 degC, 8-pin TSSOP (PW), Green (RoHS & no Sb/Br)", IN1 Output Current(Max)(A)=1.25, IN1, IN2 Input Voltage(Max)(V)=5.5, IN1, IN2 Input Voltage(Min)(V)=2.8, Manufacturer="Texas Instruments", Code_JEDEC=MO-153, ComponentLink1Description=Datasheet, ComponentLink1URL=http://www.ti.com/general/docs/lit/getliterature.tsp?genericPartNumber=TPS2113A&fileType=pdf, DatasheetVersion=SBVS045C, Eco-Plan="Green (RoHS & no Sb/Br)", IN1 rDS(on)(Typ)(mOhm)=84, IN2 Output Current(Max)(A)=1.25, IN2 rDS(on)(Typ)(Ohms)=0.084, Mounting Technology="Surface Mount", Number of Inputs=2, PackageDescription="8-Pin Plastic Thin Small Outline Package 3 x 4.4 mm Body ,0.65 mm Pitch", PackageReference=PW0008A, PackageVersion="revG, Feb-2011", PartNumber=TPS2113APW, SubFamily="Power Multiplexer (MUX)"
U8: library part CMP-0326-00046-3, "ESD Solution for Super-Speed (6 Gbps) USB 3.0 Interface, 2 Channels, -40 to +85 degC, 3-pin SOT (DRT), Green (Rohs & No Sb/Br)", Breakdown Voltage(Min)(V)=9, Differential Capacitance(pF)=0.01, IO Capacitance(Typ)(pF)=0.7, IO Leakage Current(nA)=10, Manufacturer="Texas Instruments", 1394 / Firewire=TRUE, ComponentLink1Description=Datasheet, ComponentLink1URL=http://www.ti.com/general/docs/lit/getliterature.tsp?genericPartNumber=TPD2EUSB30&fileType=pdf, ComponentLink2Description="URL Link1", ComponentLink2URL=SamplesURL:http://www.ti.com/product/tpd2eusb30#samples, DatasheetVersion=SLVSAC2C, Eco-Plan="Green (RoHS & no Sb/Br)", HDMI=TRUE, IEC 61000-4-2 Air-Gap(+/- kV)=8, IEC 61000-4-2 Contact(+/- kV)=8, Mounting Technology="Surface Mount", PackageDescription="3-Flat Lead Plastic Small Outline, 1 x 1 mm (inc leads), 0.35 mm Pitch", PackageReference=DRT0003A, PackageVersion="revD, Jun-2008", PartNumber=TPD2EUSB30DRTR, Serial ATA / eSATA=TRUE, SubFamily="ESD Solution", USB Full Speed=TRUE, USB High Speed=TRUE, USB Super Speed=TRUE
U9: library part CMP-0078-00023-3, "Dual High Speed USB To Multipurpose UART/FIFO IC, 64-pin LQFP, Tape and Reel", Manufacturer=FTDI, ComponentLink1Description="Manufacturer URL", ComponentLink1URL=http://www.ftdichip.com/, ComponentLink2Description=Datasheet, ComponentLink2URL=http://www.ftdichip.com/Support/Documents/DataSheets/ICs/DS_FT2232H.pdf, DatasheetVersion="ver 2.21, Jun-2012", PackageDescription="64-Pin Thin Quad Flat Pack, 10 x 10 x 1.4 mm Body, 0.5 mm Pitch", PackageReference=LQFP-64, PackageVersion=Jun-12, PartNumber=FT2232HL-Reel, RevisionNote="DatasheetVersion updated to 2.21 Jun-2012"
U10: library part CMP-1615-00149-4, "IC INVERTER SCHMITT 6CH 14SOIC", Manufacturer="TEXAS INSTRUMENTS", Max Supply Voltage=3.6V, Min Supply Voltage=1.65V, Nominal Supply Current=1uA, Package=D0014A, Temperature="-40°C to +125°C", Temperature Range High=+125°C, Temperature Range Low=-40°C, Automotive=No, Category=IC, ComponentLink2Description=Datasheet, ComponentLink2URL=https://www.ti.com/lit/gpn/SN74LVC14A, Device Class L1="Integrated Circuits (ICs)", Device Class L2="Logic ICs", Device Class L3="Logic Gates", Digikey Description="IC INVERTER SCHMITT 6CH 14SOIC", Height=1.75mm, Lead Free=Yes, Logic Function Desc=Inverting, Manufacturer Part Number=SN74LVC14AD, Mouser Description="In a Pack of 10, Texas Instruments SN74LVC14AD, Hex Schmitt Trigger CMOS Inverter, 14-Pin SOIC", Number Of Circuits=6, Number of Inputs=1, Number of Outputs=1, Octopart=https://octopart.com/sn74lvc14ad-texas+instruments-22854, Propagation Delay=3.2ns, RoHS=TRUE, Standoff Height=0.1mm
U11: library part CMP-0162-00356-2, "IC EEPROM 2K SPI 2MHZ SOT23-6", Case/Package=SOT-23, Frequency=2MHz, Max Operating Temperature=85°C, Max Supply Voltage=5.5V, Min Operating Temperature=-40°C, Min Supply Voltage=2.5V, Nominal Supply Current=2mA, Package Quantity=3000, Access Time=250ns, Contact Plating=Tin, Density=2Kb, Height=1.3mm, Interface=Serial, Lead Free="Lead Free", Length=3.1mm, Max Frequency=2MHz, Memory Size=2Kb, Memory Type=EEPROM, Mount="Surface Mount", Number of Pins=6, Packaging="Tape and Reel", Radiation Hardening=No, REACH SVHC="No SVHC", Width=1.8mm
Y2: library part CMP-27762-015716-1, "Crystal 24MHz ±20ppm (Tol) ±50ppm (Stability) 12pF FUND 50Ω Automotive 4-Pin Ultra Mini-CSMD T/R", Case/Package=SMD/SMT, ESR (Equivalent Series Resistance)=50R, Frequency=24MHz, Frequency Stability=50ppm, Frequency Tolerance=20ppm, Load Capacitance=12pF, Max Operating Temperature=125°C, Min Operating Temperature=-40°C, Ratings=AEC-Q200, Height=0.031inch, Length=0.126inch, Mount="Surface Mount", Packaging="Cut Tape", RoHS Compliant=Yes, Series=ABM8AIG, Width=0.098inch

## Via types
v1: diameter 19.68, hole 7.87, Top Layer to Bottom Layer, 9 vias

## Nets (pads, with @x,y where several pads share a name; then routed paths per layer and width w, separated by ;. In a path a pad name is that pad's centre, name@x,y a point inside that pad or via, vN(x,y) a via of type N, cw(c..) or ccw(c..) an arc to the next point about the centre after c; other vN are vias at no path point)
3V3AKKU: C4.1 C11.2 C14.2 C39.2 U2.3 U7.6
3V3BUS: C29.2 C32.2 C38.2 R37.2 U5.5 U7.8 U9.59
5VBUS: C31.2 C35.2 J9.A4 J9.A9 J9.B4 J9.B9 U5.1
+3V3: C2.1 C5.2 C6.2 C7.1 C8.1 C22.2 C33.2 C37.2 C43.2 C44.2 C45.2 C46.2 C53.2 C54.2 C55.2 D1.1 FB1.1 FB2.1 J8.1 L1.1 P1.5 P4.1 P4.2 P5.1 P5.2 P14.9 P14.10 P15.1 P15.2 R8.2 R30.2 R31.2 R32.2 R33.2 R34.2 R35.2 R36.1 R44.2 R49.2 R53.1 R56.2 R57.2 R60.2 SW3.2 SW5.1 U1.1 U1.29 U1.30 U4.5 U4.8 U6.8 U7.7 U9.20 U9.31 U9.42 U9.50 U9.56 U10.14 U11.6
+5V: C15.2 C17.2 J2.3 J3.1 J7.3 U3.3
+12V: C13.2 C16.2 J4.1 J5.1 J6.1 U2.1 U3.1
GND: C1.2 C3.2 C4.2 C5.1 C6.1 C7.2 C8.2 C10.1 C11.1 C13.1 C14.1 C15.1 C16.1 C17.1 C22.1 C25.1 C26.1 C29.1 C31.1 C32.1 C33.1 C35.1 C37.1 C38.1 C39.1 C40.1 C41.1 C42.1 C43.1 C44.1 C45.1 C46.1 C49.1 C50.1 C52.1 C53.1 C54.1 C55.1 C56.2 C57.2 J2.4 J3.2 J4.2 J5.2 J6.2 J7.4 J8.2 J9.A1 J9.A12 J9.B1 J9.B12 L2.1 P1.4 P4.9 P4.10 P5.9 P5.10 P8.1 P8.2 P14.1 P14.2 P15.9 P15.10 Q2.2 Q3.2 Q4.2 Q5.2 R5.1 R20.1 R21.1 R26.1 R27.1 R38.1 R39.1 R40.1 R41.1 R42.1 R43.1 R47.2 R55.1 SW3.3 SW6.2 SW7.2 SW8.2 U1.33 U2.2 U3.2 U4.2 U4.3 U4.6 U4.7 U5.7 U5.9 U6.3 U7.2 U7.5 U8.3 U9.1 U9.5 U9.10 U9.11 U9.13 U9.15 U9.25 U9.35 U9.47 U9.51 U10.7 U10.9 U10.11 U10.13 U11.2
  other v1: 11576.69,1726.69 11620,1726.69 11663.31,1726.69 11576.69,1770 11620,1770 11663.31,1770 11576.69,1813.31 11620,1813.31 11663.31,1813.31
Net*1_1: C9.1 C10.2
NetC1_1: C1.1 U1.27
NetC2_2: C2.2
NetC3_1: C3.1 U1.28
NetC9_2: C9.2 L2.2 U1.2
NetC18_1: C18.1 IC3.46
NetC18_2: C18.2 C19.2 C20.1 C21.1 C23.1 C24.1 C27.1 IC3.12 IC3.18 IC3.31 IC3.47 IC3.63
NetC19_1: C19.1 IC3.30
NetC20_2: C20.2 C21.2 C23.2 C24.2 C27.2 IC3.1 IC3.13 IC3.19 IC3.32 IC3.48 IC3.64
NetC25_2: C25.2 IC3.5 Y2.1
NetC26_2: C26.2 R62.1 Y2.3
NetC47_1: C49.2 FB1.2 U9.9
NetC48_1: C50.2 FB2.2 U9.4
NetC56_1: C56.1 U9.2
NetC57_1: C57.1 U9.3
NetD1_2: D1.2 R9.1
NetD1_3: D1.3 R12.1
NetD1_4: D1.4 R13.1
NetD2_1: D2.1 U9.29
NetD2_2: D2.2 R33.1
NetD3_1: D3.1 U9.54
NetD3_2: D3.2 R35.1
NetDS1_1: DS1.1 R32.1
NetDS1_2: DS1.2 U9.30
NetDS2_1: DS2.1 R34.1
NetDS2_2: DS2.2 U9.55
NetIC1_1: U1.20
NetIC1_2: U1.22
NetIC1_3: U1.19 U1.23
NetIC1_6: R2.1
NetIC1_7: U1.18
NetIC3_6: IC3.6 R62.2
NetIC3_7: IC3.7 P15.3
NetIC3_14: IC3.14 P5.7
NetIC3_15: IC3.15 P5.8
NetIC3_16: IC3.16 P15.7
NetIC3_17: IC3.17 P15.4
NetIC3_20: IC3.20 U4.12
NetIC3_21: IC3.21 U4.13
NetIC3_22: IC3.22 U4.1
NetIC3_23: IC3.23 U4.14
NetIC3_24: IC3.24 R16.1 R18.2
NetIC3_25: IC3.25 R17.1 R19.2
NetIC3_26: IC3.26 P15.8
NetIC3_27: IC3.27 P15.6
NetIC3_28: IC3.28 R22.1 R24.2
NetIC3_29: IC3.29 R23.1 R25.2
NetIC3_33: IC3.33 P4.5
NetIC3_34: IC3.34 P4.7
NetIC3_35: IC3.35 P4.6
NetIC3_36: IC3.36 P4.8
NetIC3_37: IC3.37 P14.7
NetIC3_38: IC3.38 P14.8
NetIC3_39: IC3.39 P4.4
NetIC3_40: IC3.40 P4.3
NetIC3_41: IC3.41 R29.1
NetIC3_42: IC3.42 R48.2
NetIC3_43: IC3.43 P14.3
NetIC3_44: IC3.44 P14.6
NetIC3_45: IC3.45 P14.4
NetIC3_53: IC3.53 P5.6
NetIC3_54: IC3.54 P5.4
NetIC3_55: IC3.55 P14.5
NetIC3_56: IC3.56 U4.9
NetIC3_57: IC3.57 U4.4
NetIC3_58: IC3.58 P5.3
NetIC3_59: IC3.59 P5.5
NetIC3_60: IC3.60 P15.5 SW5.4
NetIC3_61: IC3.61 R30.1 U6.7
NetIC3_62: IC3.62 R28.1
NetJ1_1: U1.8
NetJ1_3: U1.16
NetJ1_5: U1.6
NetJ2_1: J2.1 R16.2
NetJ2_2: J2.2 R17.2
NetJ7_1: J7.1 R22.2
NetJ7_2: J7.2 R23.2
NetJ9_1: J9.1 J9.2 J9.3 J9.4 R47.1
NetJ9_A5: J9.A5 R39.2
NetJ9_A6: J9.A6 J9.B6 R52.1 U8.1
NetJ9_A7: J9.A7 J9.B7 R51.1 U8.2
NetJ9_B5: J9.B5 R43.2
NetL1_2: L1.2 U1.3 U1.4
NetP1_1: P1.1 U1.26 U6.10
NetP1_2: P1.2 P3.1 Q4.3 R57.1 SW7.3 U1.15
NetP1_3: P1.3 U1.14
NetP1_7: P1.7 P2.1 Q5.3 R60.1 SW8.3 U1.7
NetP1_8: P1.8 R1.2 U1.25
NetP2_2: P2.2
NetP3_2: P3.2
NetP6_1: P6.1 U6.2
NetP6_2: P6.2 R54.2
NetP7_1: P7.1 R31.1 U6.4
NetP7_2: P7.2 U9.39
NetP9_1: P9.1 R37.1 R42.2
NetP9_2: P9.2 U7.3
NetP10_1: P10.1 U9.18
NetP10_2: P10.2 R46.1
NetP11_1: P11.1 U9.21
NetP11_2: P11.2 U10.1
NetP12_1: P12.1 U9.40
NetP12_2: P12.2 U10.3
NetP13_1: P13.1 U9.43
NetP13_2: P13.2 U10.5
NetQ1_1: U1.24
NetQ1_2: R1.1
NetQ1_3: U6.6
NetQ2_1: Q2.1 R46.2
NetQ2_3: Q2.3 R44.1 R45.1
NetQ3_1: Q3.1 R50.2
NetQ3_3: Q3.3 R49.1 SW6.3
NetQ4_1: Q4.1 R58.2
NetQ5_1: Q5.1 R61.2
NetR2_2: R2.2 U1.21
NetR5_2: R5.2 U1.31
NetR6_1: U1.13
NetR8_1: R8.1 U1.32
NetR9_2: R9.2 R10.1
NetR10_2: R10.2 U1.12
NetR12_2: R12.2 U1.10
NetR13_2: R13.2 U1.9
NetR18_1: R18.1 R20.2
NetR19_1: R19.1 R21.2
NetR24_1: R24.1 R26.2
NetR25_1: R25.1 R27.2
NetR28_2: R28.2 U6.9
NetR29_2: R29.2 U9.17
NetR36_2: R36.2 U7.1
NetR38_2: R38.2 U7.4
NetR40_2: R40.2 SW3.4 SW3.5 SW3.6 SW3.7
NetR41_2: R41.2 SW4.4 SW4.5 SW4.6 SW4.7
NetR45_2: R45.2 SW5.3
NetR48_1: R48.1 U9.16
NetR50_1: R50.1 U10.2
NetR51_2: R51.2 U9.7
NetR52_2: R52.2 U9.8
NetR53_2: R53.2 U9.14
NetR54_1: R54.1 U9.38
NetR55_2: R55.2 U9.6
NetR56_1: R56.1 R59.1 U11.1
NetR58_1: R58.1 SW4.3 U10.4
NetR59_2: R59.2 U9.61 U11.3
NetR61_1: R61.1 U10.6
NetSW3_1: SW3.1 SW4.2
NetSW4_1: SW4.1 U6.1 U6.5
NetU9_62: U9.62 U11.4
NetU9_63: U9.63 U11.5
VCORE: C40.2 C41.2 C42.2 C52.2 U9.12 U9.37 U9.49 U9.64
pads on no net: IC3.2 IC3.3 IC3.4 IC3.8 IC3.9 IC3.10 IC3.11 IC3.49 IC3.50 IC3.51 IC3.52 J9.A8 J9.B8 P1.6 P1.MP1 P1.MP2 SW3. SW4. SW5.2 SW6.1 SW6.4 SW7.1 SW7.4 SW8.1 SW8.4 U1.5 U1.11 U1.17 U4.10 U4.11 U5.6 U5.10 U9.19 U9.22 U9.23 U9.24 U9.26 U9.27 U9.28 U9.32 U9.33 U9.34 U9.36 U9.41 U9.44 U9.45 U9.46 U9.48 U9.52 U9.53 U9.57 U9.58 U9.60 U10.8 U10.10 U10.12 Y2.2 Y2.4

## Silkscreen, mask and mechanical layers (free items; w line width, h text height)
Mechanical 1:
  the board outline again, w10

## Text inside footprints (layer, text, board x,y; h text height)
U5: Top 3D Body "*" at 28319.5,2606 h0; Top Overlay "*" at 28264.5,2577 h0